# Altium PCB InterfaceUtil.PcbDoc
Units mm, origin at the board's own origin, x right, y up, seen from the top; angles counter-clockwise.
Board outline 90 x 30 mm, 2 copper layers (Top Layer, Bottom Layer); 34 components, 24 nets, 110 pads, 9 vias.
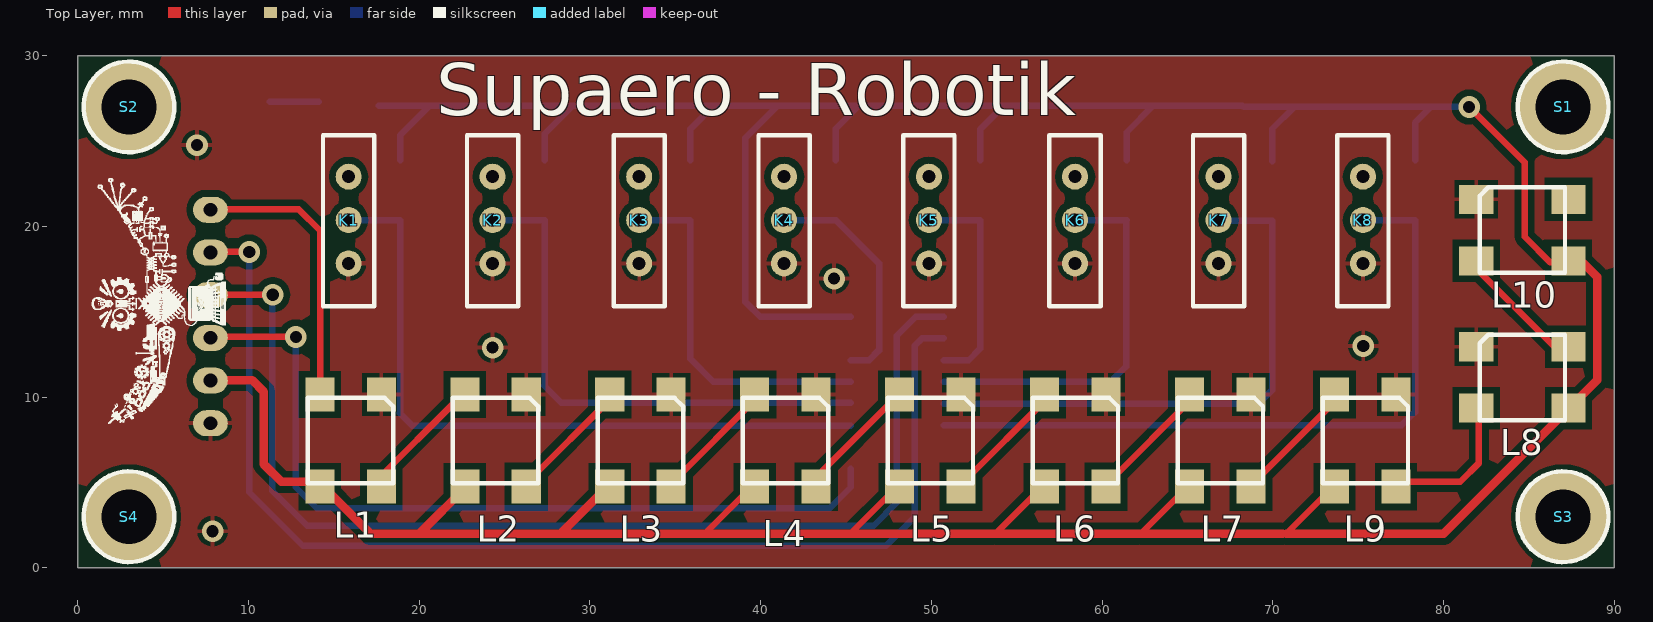
[diagram p0: Top Layer view]
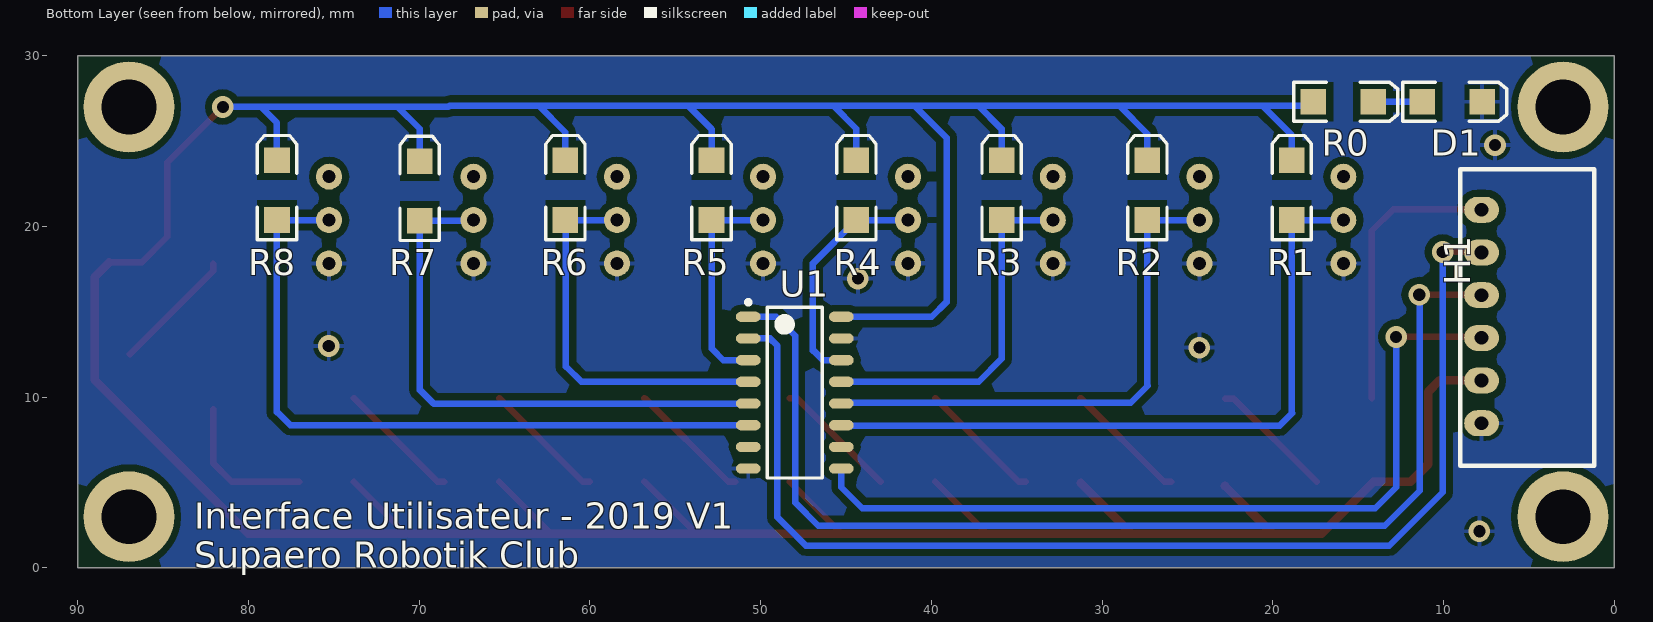
[diagram p1: Bottom Layer view, seen from below]

## Layer stack, top to bottom
Top Solder: solder mask 0.0102, Solder Resist, Dk 3.5
Top Layer: signal copper 0.0356
Dielectric 1: dielectric 0.32, FR-4, Dk 4.8
Bottom Layer: signal copper 0.0356
Bottom Solder: solder mask 0.0102, Solder Resist, Dk 3.5

## Board outline
0,0 90,0 90,30 0,30

## Design rules (kind name [scope] priority, off if disabled: settings)
Clearance [All] p1: gap=0.4
ComponentClearance [InComponent('D1') vs InComponent('R0')] p1: gap=0 collisioncheckmode=3 verticalgap=0 showdistances=FALSE
ComponentClearance ComponentClearance_1 [All] p2: gap=0.254 collisioncheckmode=3 verticalgap=0.254 showdistances=FALSE
PlaneConnect [All] p1: planeconnectstyle=Relief reliefexpansion=0.5 reliefentries=4 reliefconductorwidth=0.3 reliefairgap=0.3
PolygonConnect [All] p1: connectstyle=Relief reliefconductorwidth=0.254 reliefentries=4 polygonreliefangle="90 Angle" airgapwidth=0.254
RoutingVias [All] p1: holewidth=0.711 width=1.27 viastyle="Through Hole" minholewidth=0.711 minwidth=1.27 maxholewidth=0.711 maxwidth=1.27
SolderMaskExpansion [All] p1: expansion=0.102
Width [All] p1: maxlimit=0.635 minlimit=0.381 preferedwidth=0.381
28 further rules are at their usual default settings.

## Components (designator, comment, footprint, x,y, rotation, side; value= is the part's Value field where it differs from the comment)
D1 "LED2" 3.2X1.6X1.1 9.49,27.305 r180 bottom
H1 "Header 6" "MOLEX SPOX 6X1H" 7.774,8.475 r90 bottom
K1 "Switch" SWITCH 15.87,17.833 r90 top
K2 "Switch" SWITCH 24.302,17.833 r90 top
K3 "Switch" SWITCH 32.888,17.833 r90 top
K4 "Switch" SWITCH 41.371,17.833 r90 top
K5 "Switch" SWITCH 49.855,17.833 r90 top
K6 "Switch" SWITCH 58.415,17.833 r90 top
K7 "Switch" SWITCH 66.822,17.833 r90 top
K8 "Switch" SWITCH 75.28,17.833 r90 top
L1 "NeoPixel" NEOPIXEL 17.78,10.16 r270 top
L2 "NeoPixel" NEOPIXEL 26.271,10.16 r270 top
L3 "NeoPixel" NEOPIXEL 34.762,10.16 r270 top
L4 "NeoPixel" NEOPIXEL 43.253,10.16 r270 top
L5 "NeoPixel" NEOPIXEL 51.743,10.16 r270 top
L6 "NeoPixel" NEOPIXEL 60.234,10.16 r270 top
L7 "NeoPixel" NEOPIXEL 68.725,10.16 r270 top
L8 "NeoPixel" NEOPIXEL 77.216,10.16 r270 top
L9 "NeoPixel" NEOPIXEL 81.915,12.954 r0 top
L10 "NeoPixel" NEOPIXEL 81.915,21.59 r0 top
R0 "Res2" 3.2X1.6X1.1 15.875,27.305 r180 bottom
R1 "Res2" 3.2X1.6X1.1 18.892,22.126 r90 bottom
R2 "Res2" 3.2X1.6X1.1 27.35,22.126 r90 bottom
R3 "Res2" 3.2X1.6X1.1 35.885,22.126 r90 bottom
R4 "Res2" 3.2X1.6X1.1 44.394,22.126 r90 bottom
R5 "Res2" 3.2X1.6X1.1 52.877,22.126 r90 bottom
R6 "Res2" 3.2X1.6X1.1 61.437,22.126 r90 bottom
R7 "Res2" 3.2X1.6X1.1 69.972,22.075 r90 bottom
R8 "Res2" 3.2X1.6X1.1 78.328,22.126 r90 bottom
S1 "Screw M3" "Screw M3" 87,27 r0 top
S2 "Screw M3" "Screw M3" 3,27 r0 top
S3 "Screw M3" "Screw M3" 87,3 r0 top
S4 "Screw M3" "Screw M3" 3,3 r0 top
U1 "74HC165" "16 PINS SOIC, TI" 48.001,10.264 r180 bottom

## Footprints (in the part's own frame and the unit in brackets; to place one, negate y for a bottom-side part, rotate by r counter-clockwise, add the part's x,y. Pads: shape width x height; smd on the part's side, far side on the other; paste and mask are expansions set on the pad)
3.2X1.6X1.1 [mm] "SMT LED; 2 Flat Leads"
  rect 1.5x1.5 smd: 1(-1.75,0) 2(1.75,0)
  silkscreen extent -2.9,-1.15 3.2,1.15
"16 PINS SOIC, TI" [mm] "SOIC, 16-Leads, Body 9,90x3,90mm, Pitch 1,27mm, IPC Medium Density"
  oval 1.45x0.6 smd: 1(-2.725,4.445) 2(-2.725,3.175) 3(-2.725,1.905) 4(-2.725,0.635) 5(-2.725,-0.635) 6(-2.725,-1.905) 7(-2.725,-3.175) 8(-2.725,-4.445) 9(2.725,-4.445) 10(2.725,-3.175) 11(2.725,-1.905) 12(2.725,-0.635) 13(2.725,0.635) 14(2.725,1.905) 15(2.725,3.175) 16(2.725,4.445)
  silkscreen extent -2.85,-5 1.6,5.42, body extent -3,-5 3,5, height 1.75
"MOLEX SPOX 6X1H" [mil] "MOLEX SPOX 6X1H, 22-05-7065"
  oval 60x80 hole 31.5: 1(0,0) 2(98.43,0) 3(196.85,0) 4(295.28,0) 5(393.7,0) 6(492.13,0)
  silkscreen extent -98,-260 586,49, body extent -95,-260 590,51, height 193
NEOPIXEL [mm]
  rect 2x1.7 smd: 1(0,0) 2(0,-3.6) 3(5.4,-3.6) 4(5.4,0)
  silkscreen extent 0.2,-4.3 5.2,0.7, body extent 0.19,-4.33 5.19,0.67, height 2
"Screw M3" [mm] "M3 iso Screw"
  round 5.32 hole 3.2 unplated: 0(0,0)
  silkscreen extent -2.66,-2.66 2.66,2.66
SWITCH [mil] "2 pos switch,  09.03290.01"
  round 60 hole 30: 0(0,0) 1(100,0) 2(200,0)
  silkscreen extent -98,-59 295,59, body extent -98,-59 295,59, height 291

## Part data
D1: "Typical RED, GREEN, YELLOW, AMBER GaAs LED"
H1: "Header, 6-Pin"
K1 K2 K3 K4 K5 K6 K7 K8: "3 pos switch, 09.03290.01"
R0 R1 R2 R3 R4 R5 R6 R7 R8: "Resistor"
U1: library part SN74HC165, "8 bits Shift Register"

## Via types
v1: diameter 1.27, hole 0.711, Top Layer to Bottom Layer, 9 vias

## Nets (pads, with @x,y where several pads share a name; then routed paths per layer and width w, separated by ;. In a path a pad name is that pad's centre, name@x,y a point inside that pad or via, vN(x,y) a via of type N, cw(c..) or ccw(c..) an arc to the next point about the centre after c; other vN are vias at no path point)
GND: D1.2 H1.1 K1.0 K2.0 K3.0 K4.0 K5.0 K6.0 K7.0 K8.0 L1.1 L2.1 L3.1 L4.1 L5.1 L6.1 L7.1 L8.1 L9.1 L10.1 U1.8 U1.15
  other v1: 7.9,2.15 24.3,12.9 75.3,13 44.305,16.946 6.985,24.765
NetD1_1: D1.1 R0.2 | length 2.9
  Bottom Layer w0.381: D1.1 R0.2
NetH1_3: H1.3 U1.9 | length 48.3
  Top Layer w0.381: H1.3@7.9,13.525 v1(12.775,13.525)
  Bottom Layer w0.381: v1(12.775,13.525) 12.775,4.725 14,3.5 44.05,3.5 45.276,4.726 U1.9
NetH1_4: H1.4 U1.1 | length 66.1
  Top Layer w0.381: H1.4@7.875,16 v1(11.425,16)
  Bottom Layer w0.381: v1@11.4,16.1 11.4,4.525 13.45,2.475 46.625,2.475 47.975,3.825 47.975,13.592 49.093,14.709 U1.1
NetH1_5: H1.5 U1.2 | length 69.1
  Top Layer w0.381: H1.5@7.9,18.525 v1@10.05,18.525
  Bottom Layer w0.381: v1@10.05,18.45 10.05,4.425 13.175,1.3 47.35,1.3 49.017,2.967 49.017,13.007 49.448,13.439 U1.2
  other v1: 10.05,18.5
NetH1_6: H1.6 L1.2 | length 16.6
  Top Layer w0.381: H1.6@7.9,21 12.95,21 14.2,19.75 L1.2@14.2,9.925
NetK1_1: K1.1 R1.1 U1.11 | length 41
  Bottom Layer w0.381: K1.1@15.872,20.376 R1.1 18.892,9.07 ; 18.867,9.07 19.603,8.334 U1.11@45.276,8.334
NetK2_1: K2.1 R2.1 U1.12 | length 31.1
  Bottom Layer w0.381: K2.1 27.348,20.373 27.348,10.673 ; 27.322,10.673 28.316,9.68 U1.12@45.276,9.68
NetK3_1: K3.1 R3.1 U1.13 | length 21.1
  Bottom Layer w0.381: K3.1@32.89,20.376 R3.1 35.885,12.245 37.231,10.899 U1.13
NetK4_1: K4.1 R4.1 U1.14 | length 13.6
  Bottom Layer w0.381: K4.1@41.374,20.376 R4.1 46.934,17.836 46.934,12.728 ; U1.14 46.35,12.169 46.908,12.728
NetK5_1: K5.1 R5.1 U1.3 | length 13
  Bottom Layer w0.381: K5.1@49.857,20.376 R5.1 52.877,12.83 ; U1.3 52.192,12.169 52.852,12.83
NetK6_1: K6.1 R6.1 U1.4 | length 22.6
  Bottom Layer w0.381: U1.4 60.497,10.899 61.386,11.788 ; K6.1@58.417,20.376 R6.1 ; 61.412,11.788 R6.1@61.412,20.376
NetK7_1: K7.1 R7.1 U1.5 | length 32.6
  Bottom Layer w0.381: U1.5 69.159,9.629 69.946,10.417 ; K7.1@66.87,20.325 R7.1 69.972,10.417
NetK8_1: K8.1 R8.1 U1.6 | length 42.2
  Bottom Layer w0.381: U1.6 77.541,8.359 78.303,9.121 ; K8.1@75.283,20.376 R8.1 78.328,9.121
NetL1_4: L1.4 L2.2 | length 7.4
  Top Layer w0.381: L1.4@17.425,5.05 22.275,9.9 L2.2@22.775,9.9
NetL2_4: L2.4 L3.2 | length 7.3
  Top Layer w0.381: L2.4@25.952,5.046 26.365,5.046 L3.2@31.265,9.946
NetL3_4: L3.4 L4.2 | length 7.3
  Top Layer w0.381: L3.4@34.465,5.046 34.878,5.046 L4.2@39.778,9.946
NetL4_4: L4.4 L5.2 | length 7.3
  Top Layer w0.381: L4.4@42.978,5.046 47.878,9.946 L5.2@48.291,9.946
NetL5_4: L5.4 L6.2 | length 7.3
  Top Layer w0.381: L5.4@51.491,5.046 51.904,5.046 L6.2@56.804,9.946
NetL6_4: L6.4 L7.2 | length 7.3
  Top Layer w0.381: L6.4@60.004,5.046 60.417,5.046 L7.2@65.317,9.946
NetL7_4: L7.4 L8.2 | length 7.3
  Top Layer w0.381: L7.4@68.517,5.046 68.93,5.046 L8.2@73.83,9.946
NetL8_4: L8.4 L9.2 | length 8.7
  Top Layer w0.381: L8.4@77.03,5.046 80.984,5.046 82.076,6.138 L9.2@82.076,9.301
NetL9_4: L9.4 L10.2 | length 7.3
  Top Layer w0.381: L10.2@82.05,17.814 82.05,17.401 L9.4@86.95,12.501
VCC: H1.2 L1.3 L2.3 L3.3 L4.3 L5.3 L6.3 L7.3 L8.3 L9.3 L10.3 R0.1 R1.2 R2.2 R3.2 R4.2 R5.2 R6.2 R7.2 R8.2 U1.16 | length 253.9
  Top Layer w0.381: 36.725,2 36.732,2 L4.3@39.778,5.046 ; 45.245,2 L5.3@48.291,5.046 ; 53.625,2 53.758,2 L6.3@56.804,5.046 ; 62.15,2 62.271,2 L7.3@65.317,5.046 ; 70.575,2 70.784,2 L8.3@73.83,5.046 ; v1(81.5,27) 84.75,23.75 84.75,19.39 86.246,17.894 L10.3@88.151,17.894
  Top Layer w0.508: H1.2@7.9,11 10.225,11 10.9,10.325 10.9,6.075 11.929,5.046 14.104,5.046 17.15,2 28.275,2 ; 20,2 L2.3@22.8,4.8 ; 28.25,2 28.275,2 ; L3.3@31.25,4.975 28.275,2 ; 36.725,2 28.275,2 ; 36.732,2 45.245,2 53.625,2 ; 53.758,2 62.15,2 ; 62.271,2 70.575,2 ; 70.784,2 80,2 89,11 89,17.045 L10.3@88.151,17.894
  Bottom Layer w0.381: R0.1@17.625,27.079 20.619,27.079 ; R1.2 18.892,25.352 20.619,27.079 ; R2.2 27.35,25.429 29,27.079 ; R3.2 35.885,25.714 37.25,27.079 ; R4.2 44.394,25.723 45.75,27.079 ; U1.16 39.974,14.709 39.111,15.573 39.111,25.19 41,27.079 ; R5.2 52.877,25.706 54.25,27.079 ; R6.2 61.437,25.516 63,27.079 ; R7.2 69.972,25.722 71.25,27 ; R8.2 78.328,26.078 79.25,27 ; v1(81.5,27) 68.298,27 68.219,27.079 63,27.079 ; 20.619,27.079 29,27.079 ; 29,27.079 37.25,27.079 ; 37.25,27.079 41,27.079 ; 41,27.079 45.75,27.079 ; 45.75,27.079 54.25,27.079 ; 54.25,27.079 63,27.079
pads on no net: K1.2 K2.2 K3.2 K4.2 K5.2 K6.2 K7.2 K8.2 L10.4 S1.0 S2.0 S3.0 S4.0 U1.7 U1.10

## Polygon pours and split planes (outlines as drawn)
GND on Bottom Layer "Top Layer-No Net" (solid, pour order 11): 0,30 90,30 90,0 0,0
GND on Top Layer "Top Layer-No Net" (solid, pour order 13): 0,30 90,30 90,0 0,0

## Silkscreen, mask and mechanical layers (free items; w line width, h text height)
Top Overlay:
  drawing of 3651 lines, arcs and shapes, not listed
  text "Supaero - Robotik" at 21,26.5 h3.05
Bottom Overlay:
  text "Interface Utilisateur - 2019 V1 / Supaero Robotik Club" at 83.185,0 h1.52
Mechanical 2:
  the board outline again, w0.254